# Altium PCB 主控A1.PcbDoc
Units mil, origin at the board's own origin, x right, y up, seen from the top; angles counter-clockwise.
Board outline 4488.19 x 1720.01 mil, 2 copper layers (Top Layer, Bottom Layer); 95 components, 144 nets, 409 pads, 126 vias.
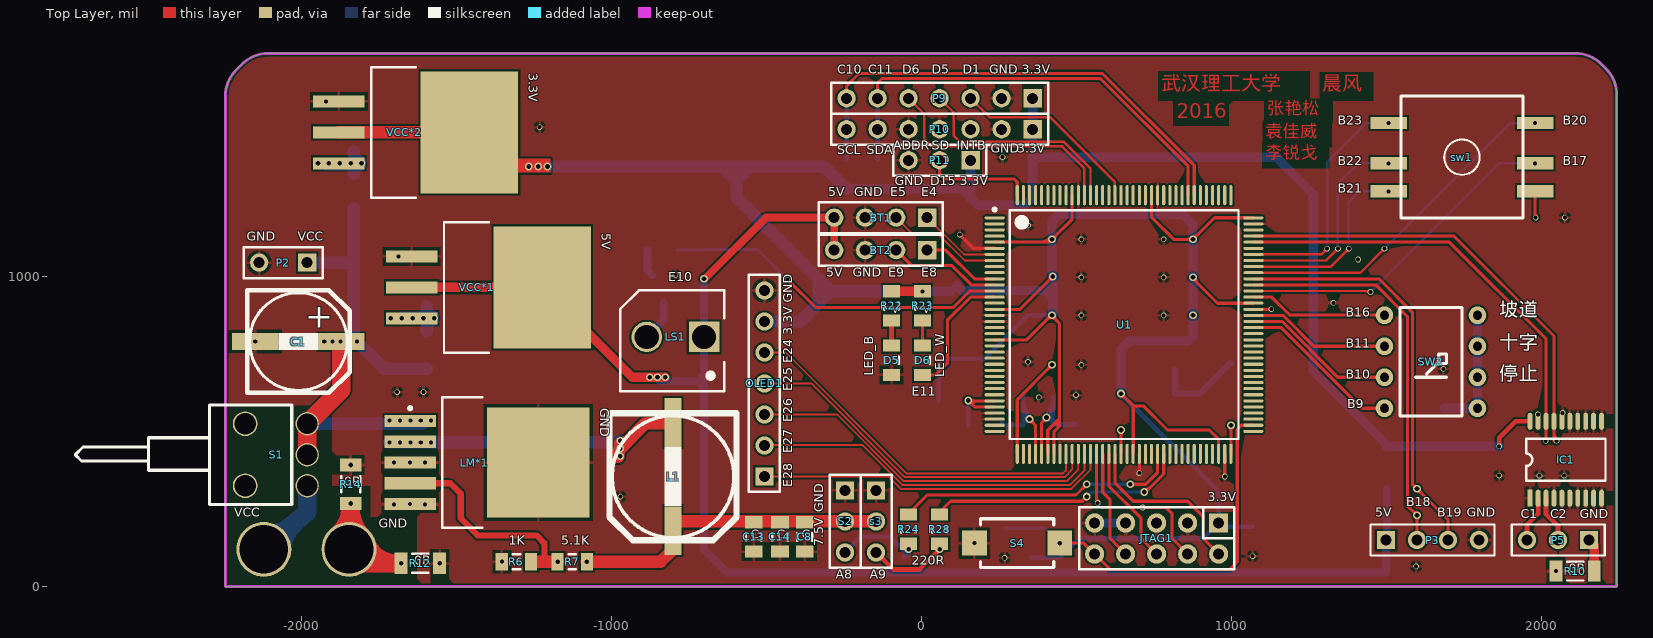
[diagram p0: Top Layer view]
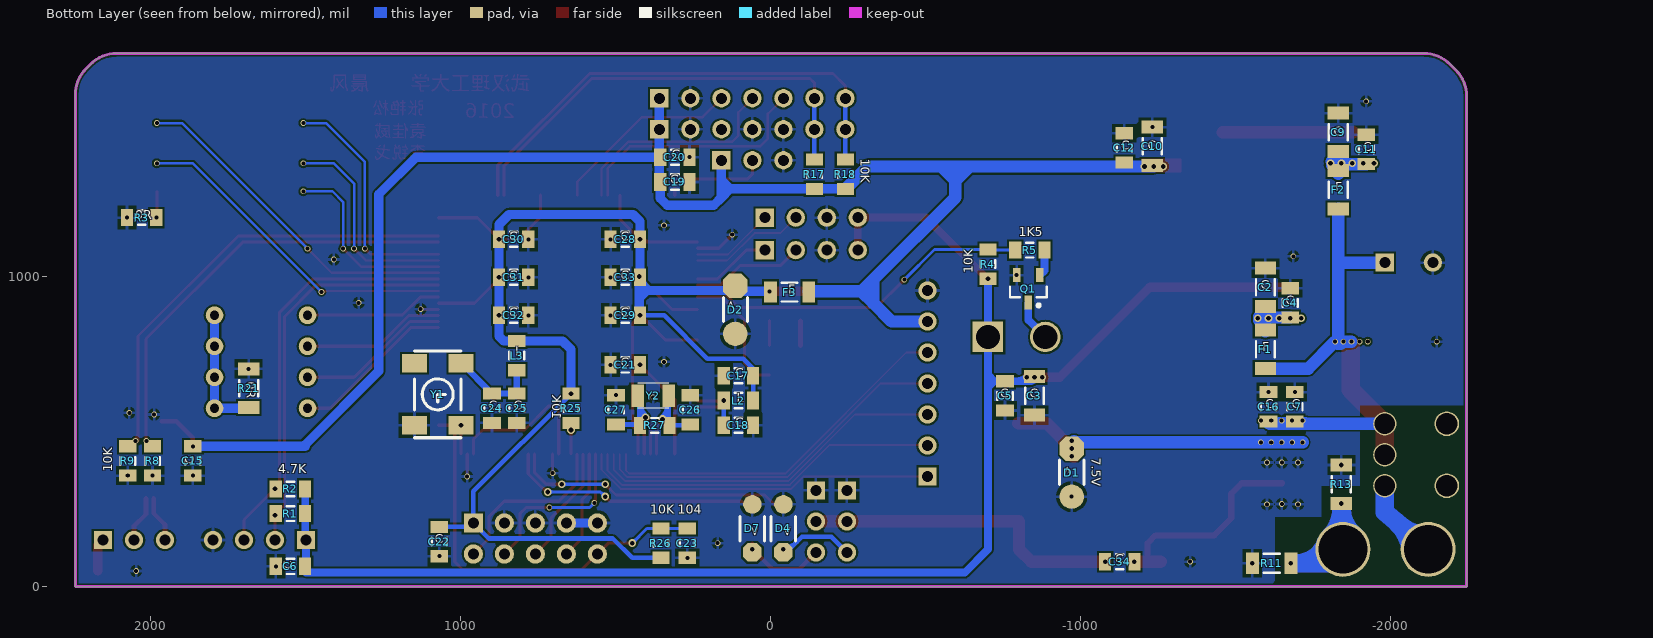
[diagram p1: Bottom Layer view, seen from below]

## Layer stack, top to bottom
Top Layer: signal copper 1.4
Dielectric: core 12.6, FR-4, Dk 4.8
Bottom Layer: signal copper 1.4

## Board outline
-2244.09,-0.01 -2244.09,1580.91 cw(c-2123.38,1580.91) -2208.74,1666.26 -2190.36,1684.64 cw(c-2105,1599.29) -2105,1720 2110,1720 cw(c2110,1599.29) 2195.36,1684.64 2208.74,1671.26 cw(c2123.38,1585.91) 2244.09,1585.91 2244.09,0.01

## Design rules (kind name [scope] priority, off if disabled: settings)
Clearance [All] p1: gap=6
PolygonConnect [All] p1: connectstyle=Relief reliefconductorwidth=10 reliefentries=4 polygonreliefangle="90 Angle" airgapwidth=10
RoutingVias [All] p1: holewidth=28 width=50 viastyle="Through Hole" minholewidth=28 minwidth=50 maxholewidth=28 maxwidth=50
SolderMaskExpansion [All] p1: expansion=4
Width [All] p1: maxlimit=60 minlimit=6 preferedwidth=10 minimp=50.000000 maximp=50.000000 favimp=50.000000
28 further rules are at their usual default settings.

## Components (designator, comment, footprint, x,y, rotation, side; value= is the part's Value field where it differs from the comment)
BT1 "Header 4" HDR1X4 20,1190 r180 top
BT2 "Header 4" HDR1X4 20,1085 r180 top
C1 "Cap Pol1" SMD-EC-F8 -1870,790 r180 top
C2 "Cap Pol1" 1206(2) -1595,965 r90 bottom
C3 "Cap Pol1" 1206(2) -850,615 r270 bottom
C4 "Cap" C2012 -1675,915 r270 bottom
C5 "Cap" C2012 -755,615 r90 bottom
C6 "100nF" C2012 1550,65 r180 bottom
C7 "680UF" c2012 -1690,580 r90 bottom
C8 "220UF" C2012 -375,160 r270 top
C9 "Cap Pol1" 1206(2) -1830,1465 r90 bottom
C10 "Cap Pol1" 1206(2) -1230,1420 r90 bottom
C11 "Cap" C2012 -1920,1410 r270 bottom
C12 "Cap" C2012 -1140,1415 r270 bottom
C13 "Cap" C2012 -540,160 r90 top
C14 "Cap" C2012 -455,160 r90 top
C15 "100nF" C2012 1865,405 r270 bottom
C16 "Cap" C2012 -1605,580 r270 bottom
C17 "100nF" C2012 105,680 r180 bottom
C18 "10nF" C2012 105,520 r0 bottom
C19 "10uF" C2012 310,1305 r0 bottom
C20 "100nF" C2012 310,1385 r0 bottom
C21 "100nF" c2012 470,715 r180 bottom
C22 "100nF" R2012 1070,145 r270 bottom
C23 "100nF" C2012 270,140 r90 bottom
C24 "10nF" C2012 900,575 r90 bottom
C25 "100nF" C2012 820,575 r90 bottom
C26 "18pF" C2012 260,570 r270 bottom
C27 "18pF" C2012 500,570 r270 bottom
C28 "Cap" C2012 470,1120 r180 bottom
C29 "Cap" C2012 470,875 r180 bottom
C30 "Cap" C2012 830,1120 r0 bottom
C31 "Cap" C2012 830,997.5 r0 bottom
C32 "Cap" C2012 830,875 r0 bottom
C33 "Cap" C2012 470,997.5 r180 bottom
C34 "Cap" C2012 -1125,80 r180 bottom
D1 "1SS355" "hole-chip diode"#1 -1010,290 r90 bottom
D2 "1N4729A" "hole-chip diode"#1 75,815 r90 bottom
D4 "1N4729A" "hole-chip diode"#2 0,265 r270 bottom
D5 "POWER" R2012 -95,730 r270 top
D6 "POWER" R2012 5,730 r270 top
D7 "1N4729A" "hole-chip diode"#2 100,265 r270 bottom
F1 "1.5A" 1206(2) -1595,765 r90 bottom
F2 "500mA" 1206(2) -1830,1280 r90 bottom
F3 "300mA" 1206(2) -60,950 r180 bottom
IC1 "74LVC245" "74LVC245 TSSOP" 1965,285 r90 top
JTAG1 "Header 5X2" IDC5X2 760,155 r180 top
L1 "33uH" SMD-EC-F10 -800,180 r90 top
L2 "Inductor" C2012 105,600 r0 bottom
L3 "Inductor" C2012 820,745 r270 bottom
LM*1 "lm2596" lm2596 -1400,400 r0 top
LS1 "Buzzer" ABSM-1574 -560,795 r180 top
OLED1 "Header 7" HDR1X7 -505,355 r90 top
P2 "Header 2" HDR1X2 -1980,1045 r180 top
P3 "Header 4" HDR1X4 1500,150 r0 top
P5 "Header 3" HDR1X3 2155,150 r180 top
P9 "Header 7" HDR1X7 360,1575 r180 top
P10 "Header 7" HDR1X7 360,1475 r180 top
P11 "endline" HDR1X3 160,1375 r180 top
Q1 "QNPN" SOT23_N -830,960 r270 bottom
R1 "Res2" R2012 1550,235 r0 bottom
R2 "Res2" R2012 1550,315 r180 bottom
R3 "10k" R2012 2030,1190 r180 bottom
R4 "10k" R2012 -700,1040 r90 bottom
R5 "Res2" R2012 -835,1085 r0 bottom
R6 "Res" R2012 -1305,80 r180 top
R7 "Res" R2012 -1125,80 r180 top
R8 "Res2" R2012 1995,405 r270 bottom
R9 "Res2" R2012 2075,405 r270 bottom
R10 "Res2" 1206(2) 2110,50 r180 top
R11 "Res2" 1206(2) -1615,75 r180 bottom
R12 "Res2" 1206(2) -1615,75 r180 top
R13 "Res2" 1206(2) -1840,330 r270 bottom
R14 "Res2" 1206(2) -1840,330 r270 top
R17 "Res2" R2012 -140,1330 r270 bottom
R18 "Res2" R2012 -240,1330 r270 bottom
R21 "Res2" 1206(2) 1685,640 r270 bottom
R22 "1K" R2012 -95,905 r90 top
R23 "1K" R2012 5,905 r90 top
R24 "220R" R2012 -40,185 r90 top
R25 "10K" R2012 645,575 r270 bottom
R26 "10K" R2012 355,140 r270 bottom
R27 "1M" R2012 375,520 r0 bottom
R28 "220R" R2012 60,185 r90 top
S1 "small switch" "small switch" -1980,325 r180 top
S2 "Header 3" HDR1X3 -245,310 r270 top
s3 "Header 3" HDR1X3 -145,310 r270 top
S4 "SW-PB" SMT_Button 310,140 r0 top
sw1 "SW-5" SW-5 1745,1385 r0 top
SW2 "SW DIP-4" switch_4to4 1495,575 r0 top
U1 "K60P144" LQFP144 655,845 r0 top
VCC*1 "LM1084" "DPAK LM2940" -1395,965 r0 top
VCC*2 "LM1086" "DPAK LM2940" -1630,1465 r0 top
Y1 "50MHZ" 贴片有源晶体 1150,720 r270 bottom
Y2 "32.768K" CT3215 330,615 r0 bottom

## Footprints (in the part's own frame and the unit in brackets; to place one, negate y for a bottom-side part, rotate by r counter-clockwise, add the part's x,y. Pads: shape width x height; smd on the part's side, far side on the other; paste and mask are expansions set on the pad)
"74LVC245 TSSOP" [mm]
  rect 1.4x0.4 smd: 1(0,0)
  oval 1.4x0.4 smd: 2(0,-0.65) 3(0,-1.3) 4(0,-1.95) 5(0,-2.6) 6(0,-3.25) 7(0,-3.9) 8(0,-4.55) 9(0,-5.2) 10(0,-5.85) 11(6.3,-5.85) 12(6.3,-5.2) 13(6.3,-4.55) 14(6.3,-3.9) 15(6.3,-3.25) 16(6.3,-2.6) 17(6.3,-1.95) 18(6.3,-1.3) 19(6.3,-0.65) 20(6.3,0)
  silkscreen extent 1.43,-6.18 4.87,0.33
1206(2) [mm]
  rect 1.05x1.75 smd: 1(-1.575,0) 2(1.575,0)
  silkscreen extent -0.65,-0.77 0.65,0.77, body extent -1.6,-0.8 1.6,0.8, height 1.6
ABSM-1574 [mm] "Magnetic Transducer Buzzer"
  rect 2.5x2.5 hole 2: 1A(3.556,-0.254)
  round 2.5 hole 2: 2A(8.255,-0.254)
  silkscreen extent 1.9,-4.06 10.41,4.19
C2012 [mm] "Chip Capacitor, 2-Leads, Body 2.0x1.2mm, IPC Low Density"
  rect 1x1.45 smd: 1(-1.2,0) 2(1.2,0)
  silkscreen extent -0.3,-0.63 0.3,0.63, body extent -0.98,-0.6 1.02,0.6, height 0.5
c2012 [mm] "Chip Capacitor, 2-Leads, Body 2.0x1.2mm, IPC Low Density"
  rect 1x1.45 smd: 1(-1.2,0) 2(1.2,0)
  silkscreen extent -0.3,-0.63 0.3,0.63, body extent -0.98,-0.6 1.02,0.6, height 0.5
CT3215 [mm]
  rect 1.05x1.85 smd: 1(0,0) 2(2.54,0)
  silkscreen extent 0,-1.02 2.54,1.02
"DPAK LM2940" [mm] "D2-PAK, 4-Pads, Body 7.93x8.69mm (max), IPC Medium Density"
  rect 4.2x1 smd: 1(-6.3,2.54) 2(-6.3,0) 3(-6.3,-2.54)
  rect 8x10 smd: 4(4.4,0)
  silkscreen extent -3.65,-5.35 0,5.35, body extent -3.65,-5.33 6,5.33, height 4.83
HDR1X2 [mm] "Connector; Header; 2 Position"
  rect 1.5x1.5 hole 0.9: 1(0,0)
  round 1.5 hole 0.9: 2(3.937,0)
  silkscreen extent -1.27,-1.27 5.21,1.27
HDR1X3 [mm] "Connector; Header; 3 Position"
  rect 1.5x1.5 hole 0.9: 1(0,0)
  round 1.5 hole 0.9: 2(2.54,0) 3(5.08,0)
  silkscreen extent -1.27,-1.27 6.35,1.27
HDR1X4 [mm] "Connector; Header; 4 Position"
  rect 1.5x1.5 hole 0.9: 1(0,0)
  round 1.5 hole 0.9: 2(2.54,0) 3(5.08,0) 4(7.62,0)
  silkscreen extent -1.27,-1.27 8.89,1.27
HDR1X7 [mm] "Connector; Header; 7 Position"
  rect 1.5x1.5 hole 0.9: 1(0,0)
  round 1.5 hole 0.9: 2(2.54,0) 3(5.08,0) 4(7.62,0) 5(10.16,0) 6(12.7,0) 7(15.24,0)
  silkscreen extent -1.27,-1.27 16.51,1.27
"hole-chip diode"#1 [mm]
  round 2 smd: 1(0,1.016)
  oct 2x2 smd: 2(3.937,1.016)
  silkscreen extent 1,0 3,2
"hole-chip diode"#2 [mm]
  round 1.524 smd: 1(0,1.016)
  oct 1.524x1.524 smd: 2(3.937,1.016)
  silkscreen extent 1,0 3,2
IDC5X2 [mil]
  rect 62x62 hole 35: 1(-200,-50)
  round 62 hole 35: 2(-200,50) 3(-100,-50) 4(-100,50) 5(0,-50) 6(0,50) 7(100,-50) 8(100,50) 9(200,-50) 10(200,50)
  silkscreen extent -250,-100 250,100
lm2596 [mm]
  rect 4.2x1 smd: 1(-6.3,3.4) 2(-6.3,1.7) 3(-6.3,0) 4(-6.3,-1.7) 5(-6.3,-3.4)
  rect 8.4x9 smd: 6(4.2,0)
  silkscreen extent -6.42,-5.35 -0.4,5.35, body extent -3.65,-5.32 6,5.33, height 4.83
LQFP144 [mm]
  oval 1.65x0.25 smd: 1(-10.6,8.75) 2(-10.6,8.25) 3(-10.6,7.75) 4(-10.6,7.25) 5(-10.6,6.75) 6(-10.6,6.25) 7(-10.6,5.75) 8(-10.6,5.25) 9(-10.6,4.75) 10(-10.6,4.25) 11(-10.6,3.75) 12(-10.6,3.25) 13(-10.6,2.75) 14(-10.6,2.25) 15(-10.6,1.75) 16(-10.6,1.25) 17(-10.6,0.75) 18(-10.6,0.25) 19(-10.6,-0.25) 20(-10.6,-0.75) 21(-10.6,-1.25) 22(-10.6,-1.75) 23(-10.6,-2.25) 24(-10.6,-2.75) 25(-10.6,-3.25) 26(-10.6,-3.75) 27(-10.6,-4.25) 28(-10.6,-4.75) 29(-10.6,-5.25) 30(-10.6,-5.75) 31(-10.6,-6.25) 32(-10.6,-6.75) 33(-10.6,-7.25) 34(-10.6,-7.75) 35(-10.6,-8.25) 36(-10.6,-8.75) 73(10.6,-8.75) 74(10.6,-8.25) 75(10.6,-7.75) 76(10.6,-7.25) 77(10.6,-6.75) 78(10.6,-6.25) 79(10.6,-5.75) 80(10.6,-5.25) 81(10.6,-4.75) 82(10.6,-4.25) 83(10.6,-3.75) 84(10.6,-3.25) 85(10.6,-2.75) 86(10.6,-2.25) 87(10.6,-1.75) 88(10.6,-1.25) 89(10.6,-0.75) 90(10.6,-0.25) 91(10.6,0.25) 92(10.6,0.75) 93(10.6,1.25) 94(10.6,1.75) 95(10.6,2.25) 96(10.6,2.75) 97(10.6,3.25) 98(10.6,3.75) 99(10.6,4.25) 100(10.6,4.75) 101(10.6,5.25) 102(10.6,5.75) 103(10.6,6.25) 104(10.6,6.75) 105(10.6,7.25) 106(10.6,7.75) 107(10.6,8.25) 108(10.6,8.75)
  oval 0.25x1.65 smd: 37(-8.75,-10.6) 38(-8.25,-10.6) 39(-7.75,-10.6) 40(-7.25,-10.6) 41(-6.75,-10.6) 42(-6.25,-10.6) 43(-5.75,-10.6) 44(-5.25,-10.6) 45(-4.75,-10.6) 46(-4.25,-10.6) 47(-3.75,-10.6) 48(-3.25,-10.6) 49(-2.75,-10.6) 50(-2.25,-10.6) 51(-1.75,-10.6) 52(-1.25,-10.6) 53(-0.75,-10.6) 54(-0.25,-10.6) 55(0.25,-10.6) 56(0.75,-10.6) 57(1.25,-10.6) 58(1.75,-10.6) 59(2.25,-10.6) 60(2.75,-10.6) 61(3.25,-10.6) 62(3.75,-10.6) 63(4.25,-10.6) 64(4.75,-10.6) 65(5.25,-10.6) 66(5.75,-10.6) 67(6.25,-10.6) 68(6.75,-10.6) 69(7.25,-10.6) 70(7.75,-10.6) 71(8.25,-10.6) 72(8.75,-10.6) 109(8.75,10.6) 110(8.25,10.6) 111(7.75,10.6) 112(7.25,10.6) 113(6.75,10.6) 114(6.25,10.6) 115(5.75,10.6) 116(5.25,10.6) 117(4.75,10.6) 118(4.25,10.6) 119(3.75,10.6) 120(3.25,10.6) 121(2.75,10.6) 122(2.25,10.6) 123(1.75,10.6) 124(1.25,10.6) 125(0.75,10.6) 126(0.25,10.6) 127(-0.25,10.6) 128(-0.75,10.6) 129(-1.25,10.6) 130(-1.75,10.6) 131(-2.25,10.6) 132(-2.75,10.6) 133(-3.25,10.6) 134(-3.75,10.6) 135(-4.25,10.6) 136(-4.75,10.6) 137(-5.25,10.6) 138(-5.75,10.6) 139(-6.25,10.6) 140(-6.75,10.6) 141(-7.25,10.6) 142(-7.75,10.6) 143(-8.25,10.6) 144(-8.75,10.6)
  silkscreen extent -10.72,-9.38 9.38,9.55, body extent -10,-10 10,10, height 1.6
R2012 [mm] "Chip Resistor, 2-Leads, Body 2.0x1.2mm, IPC Low Density"
  rect 1x1.4 smd: 1(-1.2,0) 2(1.2,0)
  silkscreen extent -0.3,-0.6 0.3,0.6, body extent -0.98,-0.6 1.02,0.6, height 0.5
"small switch" [mil]
  round 80 hole 70: 0(200,0) 0(200,-200)
  round 75 hole 65: 1(0,0) 2(0,-100) 3(0,-200)
  silkscreen extent 50,-260 748,60
SMD-EC-F8 [mm]
  rect 3.8x1.4 smd: 1(0,0) 2(7.051,0)
  silkscreen extent -0.69,-4.22 7.71,4.2
SMD-EC-F10 [mm]
  rect 4x1.4 smd: 1(0,0) 2(8.86,0)
  silkscreen extent -0.78,-5.2 9.62,5.2
SMT_Button [mil]
  rect 80x80 smd: 1(-137.8,0) 2(137.8,0)
  silkscreen extent -118,-79 118,79
SOT23_N [mm] "SOT23, 3-Leads, Body 2.9x1.3mm, Pitch 0.95mm, Lead Span 2.3mm - Reverse Pinning, IPC Medium Density"
  rect 1.15x0.6 smd: 1(1.125,0) 2(-1.125,-0.95) 3(-1.125,0.95)
  silkscreen extent -0.2,-1.5 1.47,1.5, body extent -0.7,-1.5 0.7,1.5, height 1.1
SW-5 [mm]
  rect 3x1 smd: 1(-6,2.8) 2(-6,-0.5) 3(-6,-2.8) 4(6,-2.8) 5(6,-0.5) 6(6,2.8)
  silkscreen extent -5,-5 5,5
switch_4to4 [mil]
  round 57 hole 30: 1(0,300) 2(0,200) 3(0,100) 4(0,0) 5(300,0) 6(300,100) 7(300,200) 8(300,300)
  silkscreen extent 50,-25 250,325
贴片有源晶体 [mil]
  rect 60x80 smd: 1(0,0) 2(200,0) 3(200,150) 4(0,150)
  silkscreen extent -40,0 240,150, body extent -37,-23 238,173, height 74

## Part data
BT1 BT2 P3: "Header, 4-Pin"
C1 C2 C3 C9 C10: "Polarized Capacitor (Radial)"
C4 C5 C11 C12 C28 C29 C30 C31 C32 C33: "贴片电容"
C6 C15 C17 C18 C19 C20 C21 C22 C23 C24 C25: library part Cap, "Capacitor"
C7 C8: library part CAP+
C13 C14 C16 C34: "Capacitor"
C26 C27: library part 陶瓷电容, "CAP"
D1 D2 D4 D7: library part "Diode 1N4148", "High Conductance Fast Diode"
D5 D6: library part LED, "Typical INFRARED GaAs LED"
F1 F2 F3: library part "Fuse 1", "Fuse"
JTAG1: "Header, 5-Pin, Dual row"
L1: library part Inductor, "Inductor"
LS1: "Magnetic Transducer Buzzer"
OLED1 P9 P10: "Header, 7-Pin"
P2: "Header, 2-Pin"
P5 S2 s3: "Header, 3-Pin"
P11: library part "Header 3", "Header, 3-Pin"
Q1: "NPN Bipolar Transistor"
R1 R2 R5 R8 R9 R10 R11 R12 R13 R14 R17 R18 R21: "Resistor"
R3 R4: library part Res, "Resistor of led"
R6 R7: "贴片电阻"
R22 R23 R24 R25 R26 R27 R28: library part Res, "Resistor"
S4: "Switch"
SW2: "DIP Switch, 4 Position, SPST"
VCC*1: library part LM1086
Y1: library part XTAL1
Y2: library part XTAL, "Crystal Oscillator"

## Free pads (board coordinates)
  round 177.17 hole 157.48: 0(-2120,120) 1(-1845,120)

## Via types
v1: diameter 18, hole 13, Top Layer to Bottom Layer, 78 vias
v2: diameter 25, hole 15, Top Layer to Bottom Layer, 48 vias

## Nets (pads, with @x,y where several pads share a name; then routed paths per layer and width w, separated by ;. In a path a pad name is that pad's centre, name@x,y a point inside that pad or via, vN(x,y) a via of type N, cw(c..) or ccw(c..) an arc to the next point about the centre after c; other vN are vias at no path point)
3.3V: C10.1 C12.2 C15.1 C19.2 C20.2 F3.2 IC1.20 OLED1.6 P9.1 P10.1 P11.1 R17.2 R18.2 VCC*2.2 VCC*2.4 | length 6118.2
  Top Layer w15: v1(1865,452.24) 1865,480 1918.03,533.03 IC1.20
  Top Layer w40: VCC*2.2 VCC*2.4
  Bottom Layer w30: R18.2 R17.2 132.24,1282.76 ; P11.1 160,1310.51 ; C19.2 357.24,1252.24 335,1230 185,1230 160,1255 ; C20.2 C20.2@360,1385 ; C19.2@360,1307.76 C20.2@360,1385 ; P9.1 P10.1 C20.2@360,1385 ; v1(1865,452.24) 1540,452.24 1502.76,452.24 1502.76,457.24 1265,695 1265,1265 1145,1385 C20.2@360,1385 ; 132.24,1282.76 160,1255 ; 132.24,1282.76 160,1310.51 ; 132.24,1282.76 157.24,1282.76 160,1280 ; 160,1255 160,1280 ; 160,1280 160,1310.51
  Bottom Layer w40: v2(-1235,1355) v2(-1205,1355) -640,1355 ; OLED1.6 -389.02,855 -330,914.02 ; R18.2 -312.24,1355 -550,1355 ; F3.2@-122.01,952.01 -292.01,952.01 ; -640,1355 -595,1310 ; -640,1355 -595,1355 ; -595,1310 -550,1355 ; -595,1310 -595,1355 ; -595,1310 -595,1255 -330,990 ; -595,1355 -550,1355 ; -330,914.02 -330,990 ; -330,914.02 -292.01,952.01 ; -330,990 -292.01,952.01
  other v2: -1265,1355
5V: BT1.4 BT2.4 C3.1 C5.2 C6.2 LS1.1A P3.1 R1.1 R2.2 R4.1 VCC*1.2 VCC*1.4 | length 5266.5
  Top Layer w25: v2(-700,992.76) -697.24,992.76 -500,1190 BT1.4 BT2.4
  Top Layer w30: VCC*1.2 VCC*1.4 -931.77,675 v2(-825,675)
  Bottom Layer w25: C3.1@-843.85,671.41 ccw(c-836.49,684.03) v2(-825,675) ; C3.1@-819.2,662.24 cw(c-819.2,705.8) v2(-850,675) ccw(c-835.24,677.17) C3.1@-835.24,662.24 ; -794.2,662.24 cw(c-794.2,705.8) v2(-825,675) ; v2(-700,992.76) LS1.1A -700,682.24 ; P3.1 1500,45 -625,45 -700,120 -700,642.24 ; P3.1@1502.76,152.76 R1.1 R2.2 ; C3.1@-835.24,662.24 C3.1 ccw(c-836.32,690.69) v2(-825,675) ; C3.1@-835.24,662.24 C5.2 -720,662.24 ; -720,662.24 -700,642.24 ; -720,662.24 -700,662.24 ; -720,662.24 -700,682.24 ; -700,642.24 -700,662.24 ; -700,662.24 -700,682.24
  other v2: -875,675
"ADC0 SE16": U1.36
"ADC1 SE16": U1.35
CLK: P9.7 P10.7 R18.1 U1.115 | length 1594.8
  Top Layer w10: P9.7 -240,1615 -200,1655 585,1655 881.38,1358.62 U1.115
  Bottom Layer w15: R18.1 P10.7 P9.7
DAC0: U1.38
DAC1: U1.39
EGND: pad.1 R11.2 R12.2 R13.2 R14.2 | length 1116.6
  Top Layer w60: pad.1@-1882.31,165.17 ccw(c-1956.51,254.99) -1840,254.99 pad.1@-1840,125 ; R14.2@-1840,249.36 ccw(c-1715.64,249.36) pad.1@-1803.58,161.42 ; pad.1@-1800,75 -1695,75 cw(c-1695.01,176.81) pad.1@-1790.22,140.75
  Bottom Layer w60: pad.1@-1882.31,165.17 ccw(c-1956.51,254.99) -1840,254.99 pad.1@-1840,125 ; R13.2@-1840,249.36 ccw(c-1715.64,249.36) pad.1@-1803.58,161.42 ; pad.1@-1800,75 -1695,75 cw(c-1695.01,176.81) pad.1@-1790.22,140.75
  other v2: -1677.01,75 -1840,267.99
EZP_CS: R25.2 U1.54 | length 105.6
  Top Layer w10: v2@639.7,499.7 cw(c626.51,486.51) 645.16,486.51 ; U1.54 v2@645.16,504.84 ; 645.16,487.27 cw(c662.73,487.27) v2@650.3,499.7
  other v2: 645,505
FB: C34.2 LM*1.4 R6.1 R7.2 | length 705.4
  Top Layer w20: LM*1.4 -1518.07,333.07 -1485,300 -1485,220 -1430,165 -1240,165 -1215,140 -1215,80
  Top Layer w40: R6.1 -1215,80 v2(-1172.24,80)
GND: BT1.3 BT2.3 C1.2 C2.2 C3.2 C4.1 C5.1 C6.1 C7.2 C8.2 C9.2 C10.2 C11.1 C12.1 C13.1 C14.1 C15.2 C16.1 C17.1 C18.1 C19.1 C20.1 C21.1 C22.2 C23.1 C24.1 C25.1 C26.1 C27.1 C28.1 C29.1 C30.1 C31.1 C32.1 C33.1 D1.1 D2.1 D4.1 D5.2 D7.1 IC1.1 IC1.4 IC1.5 IC1.6 IC1.7 IC1.8 IC1.9 IC1.10 IC1.11 IC1.12 IC1.13 IC1.14 IC1.15 IC1.16 IC1.19 JTAG1.3 JTAG1.5 JTAG1.7 JTAG1.9 LM*1.3 LM*1.5 LM*1.6 OLED1.7 P2.2 P3.4 P9.2 P10.2 P10.4 P10.5 P11.3 Q1.2 R3.1 R6.2 R8.2 R9.2 R10.2 R11.1 R12.1 R13.1 R14.1 R21.1 S2.1 s3.1 S4.1 U1.6 U1.17 U1.18 U1.33 U1.34 U1.44 U1.57 U1.71 U1.93 U1.107 U1.121 U1.134 VCC*1.1 VCC*2.1 Y1.2 | length 477.3
  Top Layer w10: v1@125,1131 cw(c125,1121.34) 131.83,1128.17 cw(c138.66,1135) v1@129,1135 ; v1(125,1135) 168.94,1091.06 U1.6 ; v1@701.38,368.62 ccw(c694.56,375.44) 704.21,375.44 ccw(c713.87,375.44) v1@707.04,368.62 ; v1(704.21,365.79) U1.57 ; v1@977.17,357.83 ccw(c970.82,364.18) 979.8,364.18 ; v1@979.8,355.2 U1.71 ; 979.8,365.13 ccw(c990.13,365.13) v1@982.83,357.83 ; U1.93 v1@1129.21,894.21 ; 1118.44,894.21 ccw(c1118.44,906.56) v1@1127.17,897.83
  Bottom Layer w30: JTAG1.9 JTAG1.7
  other v1: 2047.99,50 1597.24,65 -1352.24,80 270,92.76 1070,97.76 172.2,140 -1700,265 -1600,265 -1648.03,266.14 -970,290 980,355 1865,357.76 1995,357.76 2075,357.76 -1700,400 -1648.03,400 -1600,400 1990,555 2070,560 380,610 500,617.24 -1690,627.24 -1605,627.24 1685,702.01 517.24,715 345,725 -2147.59,790 517.24,875 782.76,875 1130,895 1330,915 517.24,997.5 782.76,997.5 -792.6,1004.29 1410,1055 -1685,1065 517.24,1120 782.76,1120 345,1165 2077.24,1190 262.76,1385 -1230,1482.01 -1920,1565
  other v2: -1552.99,75 -1840,392.01
K3.3V: C17.2 C22.1 C28.2 C29.2 C30.2 C31.2 C32.2 C33.2 D2.2 F3.1 JTAG1.1 L2.1 L3.1 R22.2 R23.2 R25.1 R26.2 U1.5 U1.16 U1.21 U1.42 U1.43 U1.56 U1.70 U1.94 U1.108 U1.122 U1.135 | length 6994.4
  Top Layer w10: U1.21 340.79,795.79 420,875 446.26,848.74 446.26,541.26 ; U1.16 319.21,894.21 v2(425,1000) ; U1.5 413.5,1110.75 ; 382.31,1110.75 ccw(c382.31,1160.44) v2@417.45,1125.3 ; 405.25,860.25 cw(c422.76,842.74) 422.76,867.5 cw(c422.76,856.05) 430.85,864.15 ; 406.46,1110.75 ccw(c406.46,1136.3) v2@424.52,1118.23 ; U1.42 408.94,503.94 430,525 ; 411.9,866.9 ccw(c403.8,875) v2@415.26,875 ; v2@415.5,1118.1 cw(c408.09,1116.17) 413.5,1110.75 ; v2@417.5,1000 cw(c399.39,1000) 412.2,987.2 cw(c425,974.39) v2@425,992.5 ; v2@420.86,1112.74 ccw(c418.92,1105.33) 413.5,1110.75 ; v2@422.76,1127.5 ccw(c422.76,1145.61) 435.56,1132.8 ccw(c448.36,1120) v2@430.26,1120 ; U1.43 428.62,498.62 446.26,516.26 ; v2@430.26,875 ccw(c455.02,875) 437.51,857.49 ; U1.135 487.68,1184.92 v2(422.76,1120) 413.5,1110.75 ; v2@645,614.74 cw(c645,596.64) 657.8,609.44 cw(c670.61,622.24) v2@652.5,622.24 ; v2(645,622.24) 684.53,582.72 ; U1.56 684.53,582.72 ; 695,580.47 695,582.72 ; U1.122 743.58,1191.42 815,1120 v2(877.24,1120) 946.73,1189.49 U1.108 ; v2@871.94,1114.7 ccw(c859.14,1101.89) 859.14,1120 ccw(c859.14,1138.11) v2@871.94,1125.3 ; v2(877.24,997.5) 875,995.26 956.36,913.9 U1.94 ; v2@877.24,1127.5 ccw(c877.24,1145.61) 890.05,1132.8 ccw(c902.85,1120) v2@884.74,1120 ; v2@884.74,997.5 ccw(c913.69,997.5) 893.22,977.03 ; U1.70 960.12,474.88 930,505 795,505 717.28,582.72 695,582.72 ; 430,525 446.26,541.26 ; 430,525 438.13,525 ; 438.13,525 438.13,524.38 446.26,516.26 ; 438.13,525 446.26,525 ; 446.26,516.26 446.26,525 ; 446.26,525 446.26,541.26 ; 684.53,582.72 695,582.72
  Top Layer w30: R22.2 R23.2
  Bottom Layer w15: L2.1 C17.2 57.76,702.76 90,735 205,735 345,875 v2(422.76,875) ; R26.2 447.76,92.76 510,155 910,155 JTAG1.1 ; v2(645,622.24) 960,307.24 JTAG1.1 ; C22.1 972.76,192.24 JTAG1.1
  Bottom Layer w30: v1(5,952.01) D2.2@97.01,952.01 ; D2.2 130,955 395,955 ; C33.2@418.66,978.66 ccw(c397.32,1000) C33.2@427.5,1000 ; C29.2@425,877.24 425,930 ; v2(425,1000) 425,930 ; C33.2@427.4,1000.69 cw(c409.84,995.67) C33.2@422.76,982.76 ; v2(645,622.24) 645,765 672.24,792.24 L3.1 862.24,792.24 877.24,807.24 v2(877.24,875) v2(877.24,997.5) v2(877.24,1120) 877.24,1167.76 845,1200 445,1200 422.76,1177.76 v2(422.76,1120) C33.2@422.76,982.76 ; C33.2@422.76,982.76 397.5,957.5 425,930
NetC2_1: C2.1 C4.2 F1.2 VCC*1.3 | length 256.2
  Bottom Layer w40: C4.2 v2@-1597.24,867.76 ; F1.2@-1595,822.75 cw(c-1527.75,822.75) v2@-1575.3,870.3 ; F1.2 C2.1 ccw(c-1537.51,902.99) v2@-1574.87,859.3
  other v2: -1710,865 -1675,865 -1640,865 -1605,865 -1570,865
NetC9_1: C9.1 C11.2 F2.2 VCC*2.3 | length 226.7
  Bottom Layer w40: C11.2 v2@-1850.75,1362.76 ; F2.2@-1830,1331.04 cw(c-1780.79,1331.04) v2@-1809.35,1371.11 ; F2.2 C9.1 ccw(c-1772.51,1402.99) F2.2@-1809.87,1359.3
  other v2: -1945,1365 -1910,1365 -1875,1365 -1840,1365 -1805,1365
NetC18_2: C18.2 L2.2 U1.31 U1.32 | length 327.9
  Top Layer w10: v2@152.24,592.5 cw(c152.24,574.39) 165.05,587.2 cw(c177.85,600) v2@159.74,600 ; v2@157.55,594.7 cw(c167.78,584.46) 167.78,598.94 ; v2@157.55,605.3 ccw(c172.92,620.67) 172.92,598.94 ; 165,588.94 175,598.94 ; U1.32 172.99,579.25 153.31,598.94 175,598.94 ; U1.31 175,598.94
  Bottom Layer w15: C18.2 v2(152.24,600)
NetC21_2: C21.2 U1.37 | length 362.3
  Top Layer w10: U1.37 310.51,602.76 v2(422.76,715) ; v2@415.26,715 cw(c397.15,715) 409.95,702.2 cw(c422.76,689.39) v2@422.76,707.5
NetC24_2: C24.2 C25.2 L3.2 Y1.4 | length 296
  Bottom Layer w20: L3.2 C25.2 C24.2 997.76,720 Y1.4
NetC26_2: C26.2 R27.1 U1.40 Y2.1 | length 445.8
  Top Layer w10: v2@350,532.5 cw(c350,514.39) 362.8,527.2 cw(c375.61,540) v2@357.5,540 ; v2(350,540) 369.57,520.43 U1.40
  Bottom Layer w15: C26.2@260,527.76 267.76,520 330,520 Y2.1 ; R27.1@330,528.69 cw(c351.4,528.69) v2@348.77,549.92 ; 330,564.14 ccw(c374.14,564.14) R27.1@342.93,532.93 ; Y2.1@330,600.36 ccw(c410.36,600.36) v2@353.54,543.54
NetC27_2: C27.2 R27.2 U1.41 Y2.2 | length 443.2
  Top Layer w10: U1.41 389.25,529.25 v2(405,545) ; v2@397.5,545 cw(c379.39,545) 392.2,532.2 cw(c405,519.39) v2@405,537.5
  Bottom Layer w15: v2@401.46,548.54 ccw(c344.64,605.36) Y2.2@425,605.36 ; v2@406.77,554.84 cw(c402.84,533.04) R27.2@425,533.04 ; R27.2@412.07,537.93 ccw(c380.86,569.14) 425,569.14 ; Y2.2@425,610 425,522.76 C27.2
NetD1_2: D1.2 L1.2 LM*1.2 | length 1119.5
  Top Layer w40: v2@-977.5,420 cw(c-935.25,420) v2@-965.13,449.87 ; v2@-977.25,418.08 cw(c-950.24,425.24) v2(-970,445) -888.1,526.9 L1.2@-798.1,526.9 ; v2@-970,462.5 ccw(c-970,504.75) -940.13,474.87
  Bottom Layer w40: v1(-1715,465) v1(-1681.25,465) v1(-1647.5,465) v1(-1613.75,465) v1(-1580,465) -990,465 cw(c-990,435.25) D1.2@-963.26,448.29 ; D1.2@-1000.18,465 cw(c-1000.18,414.82) D1.2@-964.7,450.3 ; D1.2@-977.4,468.77 ccw(c-951.71,473.03) D1.2@-966.86,451.85
  other v2: -970,420 -970,470
NetD4_2: D4.2 R24.1 S2.3 | length 365.7
  Bottom Layer w15: S2.3 -195,160 -100,160 D4.2@-40,100 ; -82.68,142.68 ccw(c-40,185.36) D4.2@-40,125 ; D4.2@-57.07,117.07 ccw(c-40,134.14) D4.2 -55,95 ccw(c-79.16,119.16) D4.2@-45,119.89
  other v2: -40,120
NetD5_1: D5.1 R22.1 | length 80.5
  Top Layer w15: D5.1 R22.1
NetD6_1: D6.1 R23.1 | length 80.5
  Top Layer w10: D6.1 R23.1
NetD7_2: D7.2 R28.1 s3.3 | length 272.5
  Top Layer w15: s3.3 -90,55 -5,55 v2(60,120) R28.1
NetIC1_2: IC1.2 P5.3 | length 149.7
  Top Layer w15: P5.3 1955,200 1990.59,235.59 IC1.2
NetIC1_3: IC1.3 P5.2 | length 151.1
  Top Layer w15: IC1.3 2016.18,233.82 2055,195 P5.2
NetLS1_2: LS1.2A Q1.1 | length 133.5
  Bottom Layer w25: LS1.2A -830,860 Q1.1
NetP5_1: P5.1 R10.1 | length 107
  Top Layer w30: P5.1 2172.01,132.99 R10.1
NetQ1_2: Q1.3 R5.1 | length 86.9
  Bottom Layer w25: R5.1 -882.24,1019.13 Q1.3
NetR3_2: R3.2 sw1.4 | length 94.9
  Top Layer w10: v1@1981.22,1191.54 sw1.4 ; 1981.22,1203.36 ccw(c1996.12,1203.36) v1@1985.58,1192.83
  other v1: 1982.76,1190
NetR21_2: R21.2 SW2.5 SW2.6 SW2.7 SW2.8 | length 407
  Bottom Layer w30: R21.2@1687.99,575 SW2.5 SW2.6 SW2.7 SW2.8
OLEDCLK: OLED1.5 U1.45 | length 1191.4
  Top Layer w6: OLED1.5 -437.12,755 -47.12,365 458,365 467.99,374.99 U1.45
OLEDCS: OLED1.1 U1.49 | length 1144.8
  Top Layer w6: OLED1.1 -105,355 -65,315 485,315 546.73,376.73 U1.49
OLEDDC: OLED1.2 U1.48 | length 1159
  Top Layer w6: OLED1.2 -503,457 -190.03,457 -61.03,328 481.03,328 527.05,374.02 U1.48
OLEDMISO: OLED1.4 U1.46 | length 1178
  Top Layer w6: OLED1.4 -354.09,655 -52.09,353 463,353 487.68,377.68 U1.46
OLEDRST: OLED1.3 U1.47 | length 1167.2
  Top Layer w6: OLED1.3 -271.06,555 -56.06,340 470,340 507.36,377.36 U1.47
"PGA0 DM": U1.28
"PGA0 PM": U1.27
"PGA1 DM": U1.30
"PGA1 PM": U1.29
"PGA2 DM": U1.24
"PGA2 DP": U1.23
"PGA3 DM": U1.26
"PGA3 PM": U1.25
PTA5: U1.55
PTA6: U1.58
PTA7: U1.59
PTA8: R24.2 U1.60 | length 1027.5
  Top Layer w10: R24.2@-40,245 -30,245 20,295 500,295 v2(535,330) ; v2@527.5,330 cw(c509.39,330) 522.2,317.2 cw(c535,304.39) v2@535,322.5 ; v2(675,330) 725,330 763.27,368.27 U1.60 ; v2@680.3,324.7 cw(c693.11,311.89) 693.11,330 cw(c693.11,348.11) v2@680.3,335.3
  Bottom Layer w10: v2(535,330) v2(675,330) ; v2@540.3,324.7 cw(c553.11,311.89) 553.11,330 cw(c553.11,348.11) v2@540.3,335.3 ; v2@669.7,324.7 ccw(c656.89,311.89) 656.89,330 ccw(c656.89,348.11) v2@669.7,335.3
PTA9: R28.2 U1.61 | length 947.6
  Top Layer w10: R28.2@60,240 95,275 520,275 v2(535,290) ; v2@527.5,290 cw(c509.39,290) 522.2,277.2 cw(c535,264.39) v2@535,282.5 ; v2(720,305) 725,305 782.95,362.95 U1.61 ; v2@720,312.5 ccw(c720,342.68) 741.34,321.34
  Bottom Layer w10: v2(535,290) 550,305 v2(720,305) ; v2@535,297.5 ccw(c535,315.61) 547.8,302.8 ccw(c560.61,290) v2@542.5,290 ; v2@714.7,299.7 ccw(c701.89,286.89) 701.89,305 ccw(c701.89,323.11) v2@714.7,310.3
PTA10: U1.62
PTA11: U1.63
PTA12: U1.64
PTA13: U1.65
PTA14: U1.66
PTA15: U1.67
PTA16: U1.68
PTA17: U1.69
PTA18: U1.72 Y1.3 | length 120.3
  Top Layer w10: v2@994.7,514.7 cw(c983.13,503.13) 999.49,503.13 ; U1.72 v2@999.49,519.49 ; 999.49,500.66 cw(c1019.34,500.66) v2@1005.3,514.7
  other v2: 1000,520
PTA19: U1.73
PTA24: U1.75
PTA25: U1.76
PTA26: U1.77
PTA27: U1.78
PTA28: U1.79
PTA29: U1.80
PTB0: U1.81
PTB1: U1.82
PTB2: U1.83
PTB3: U1.84
PTB4: U1.85
PTB5: U1.86
PTB6: U1.87
PTB7: U1.88
PTB8: U1.89
PTB9: SW2.4 U1.90 | length 533.3
  Top Layer w10: U1.90 1161.96,835.16 1422.12,575 SW2.4 SW2.4@1492.12,575
PTB10: SW2.3 U1.91 | length 497.2
  Top Layer w10: U1.91 1164.9,854.84 1344.75,675 SW2.3
PTB11: SW2.2 U1.92 | length 463.9
  Top Layer w10: U1.92 1167.85,874.53 1267.37,775 SW2.2
PTB16: SW2.1 U1.95 | length 445.5
  Top Layer w10: U1.95 1131.42,933.58 1189,876 SW2.1@1494,876
PTB17: sw1.5 U1.96 | length 1137.1
  Top Layer w8: U1.96 1446.73,953.27 v1(1450,950) ; 1430.04,953.27 cw(c1430.04,930.04) v1@1446.46,946.46
  Bottom Layer w8: v1(1450,950) 1865,1365 v1@1980,1365 ; v1@1450,955 ccw(c1450,967.07) 1458.54,958.54 ccw(c1467.07,950) v1@1455,950 ; 1968.39,1365 ccw(c1968.39,1378.15) v1@1977.68,1368.85 ; 1969.91,1365 cw(c1969.91,1354) v1@1977.68,1361.78
  other v1: 1981.22,1365.32
PTB18: P3.2 R1.2 U1.97 | length 1329.6
  Top Layer w10: U1.97 1467.05,972.95 1569,871 1569,261 v2(1600,230) P3.2 ; v2@1592.5,230 ccw(c1574.39,230) 1587.2,242.8 ccw(c1600,255.61) v2@1600,237.5 ; v2@1594.7,224.7 cw(c1581.89,211.89) 1600,211.89 cw(c1618.11,211.89) v2@1605.3,224.7
PTB19: P3.3 R2.1 U1.98 | length 1396.8
  Top Layer w10: U1.98 1477.36,992.64 1585,885 1585,330 v2(1600,315) 1700,215 P3.3 ; v2@1592.5,315 ccw(c1574.39,315) 1587.2,327.8 ccw(c1600,340.61) v2@1600,322.5 ; v2@1600,307.5 cw(c1600,289.39) 1612.8,302.2 cw(c1625.61,315) v2@1607.5,315
PTB20: sw1.6 U1.99 | length 1165.7
  Top Layer w8: U1.99 1417.32,1012.32 v1(1495,1090) ; v1@1490,1090 cw(c1477.93,1090) 1486.46,1081.46 cw(c1495,1072.93) v1@1495,1085
  Bottom Layer w8: v1(1495,1090) 1900,1495 v1@1981.22,1495 ; v1@1495,1095 ccw(c1495,1107.07) 1503.54,1098.54 ccw(c1512.07,1090) v1@1500,1090 ; 1968.58,1495 ccw(c1968.58,1507.88) v1@1977.68,1498.77 ; 1969.72,1495 cw(c1969.72,1483.74) v1@1977.68,1491.7
  other v1: 1981.22,1495.24
PTB21: sw1.3 U1.100 | length 681.9
  Top Layer w8: U1.100 1322.01,1032.01 v1(1380,1090) ; v1@1375,1090 cw(c1362.93,1090) 1371.46,1081.46 cw(c1380,1072.93) v1@1380,1085
  Bottom Layer w8: v1@1376.46,1093.54 ccw(c1367.93,1102.07) 1380,1102.07 ccw(c1392.07,1102.07) v1@1383.54,1093.54 ; v1(1380,1090) 1380,1240 1415,1275 v1@1508.78,1275 ; 1496.14,1275 cw(c1496.14,1262.12) v1@1505.24,1271.23 ; 1497.28,1275 ccw(c1497.28,1286.26) v1@1505.24,1278.3
  other v1: 1508.78,1274.76
PTB22: sw1.2 U1.101 | length 746.1
  Top Layer w8: U1.101 1306.69,1051.69 v1(1345,1090) ; v1@1340,1090 cw(c1327.93,1090) 1336.46,1081.46 cw(c1345,1072.93) v1@1345,1085
  Bottom Layer w8: v1@1341.46,1093.54 ccw(c1332.93,1102.07) 1345,1102.07 ccw(c1357.07,1102.07) v1@1348.54,1093.54 ; v1(1345,1090) 1345,1300 1410,1365 v1@1508.78,1365 ; 1495.95,1365 ccw(c1495.95,1378.15) v1@1505.24,1368.85 ; 1497.47,1365 cw(c1497.47,1354) v1@1505.24,1361.78
  other v1: 1508.78,1365.32
PTB23: sw1.1 U1.102 | length 832.8
  Top Layer w8: U1.102 1291.38,1071.38 v1(1310,1090) ; v1@1305,1090 cw(c1292.93,1090) 1301.46,1081.46 cw(c1310,1072.93) v1@1310,1085
  Bottom Layer w8: v1@1306.46,1093.54 ccw(c1297.93,1102.07) 1310,1102.07 ccw(c1322.07,1102.07) v1@1313.54,1093.54 ; v1(1310,1090) 1310,1370 1435,1495 v1@1508.78,1495 ; 1496.14,1495 ccw(c1496.14,1507.88) v1@1505.24,1498.77 ; 1497.28,1495 cw(c1497.28,1483.74) v1@1505.24,1491.7
  other v1: 1508.78,1495.24
PTC0: U1.103
PTC1: IC1.18 R8.1 U1.104 | length 1413.1
  Top Layer w10: U1.104 1704.25,1110.75 2016.18,798.82 IC1.18 2016.18,471.18 v1(2015,470) ; v1@2012.17,472.83 ccw(c2002.49,482.51) 2016.18,482.51
PTC2: IC1.17 R9.1 U1.105 | length 1500.1
  Top Layer w10: U1.105 1719.57,1130.43 2041.77,808.23 IC1.17 2041.77,478.23 v1(2050,470) ; 2041.77,475.38 ccw(c2055.38,475.38) v1@2045.76,465.76 ; 2041.77,499.52 ccw(c2079.52,499.52) v1@2052.83,472.83 ; v1@2046,470 ccw(c2036.34,470) 2043.17,476.83 ccw(c2050,483.66) v1@2050,474
PTC3: U1.106
PTC4: U1.109
PTC5: U1.110
PTC6: U1.111
PTC7: U1.112
PTC8: U1.113
PTC9: U1.114
PTC11: P9.6 P10.6 R17.1 U1.116 | length 1466
  Top Layer w10: P9.6 -140,1625 -126,1639 578.37,1639 861.69,1355.68 U1.116
  Bottom Layer w15: R17.1 P10.6 P9.6
PTC12: U1.117
PTC13: U1.118
PTC14: U1.119
PTC15: U1.120
PTC16: U1.123
PTC17: U1.124
PTC18: U1.125
PTC19: U1.126
PTD0: U1.127
PTD1: P9.3 U1.128 | length 619.7
  Top Layer w8: P9.3 220.47,1514.53 415.47,1514.53 625.47,1304.53 U1.128
PTD2: U1.129
PTD3: U1.130
PTD4: U1.131
PTD5: P9.4 U1.132 | length 710.4
  Top Layer w8: P9.4 105,1530 105,1455 126,1434 460.8,1434 546.73,1348.07 U1.132
PTD6: P9.5 U1.133 | length 793.6
  Top Layer w8: P9.5 10,1525 10,1445 35,1420 455,1420 527.05,1347.95 U1.133
PTD7: U1.136
PTD8: U1.137
PTD9: U1.138
PTD10: U1.139
PTD11: U1.140
PTD12: U1.141
PTD13: U1.142
PTD14: U1.143
PTD15: P11.2 U1.144 | length 348.2
  Top Layer w10: P11.2 60,1330 75,1315 300,1315 310.51,1304.49 U1.144
PTE0: U1.1
PTE1: U1.2
PTE2: U1.3
PTE3: U1.4
PTE4: BT1.1 U1.7 | length 266.8
  Top Layer w6: BT1.1 138.62,1071.38 U1.7
PTE5: BT1.2 U1.8 | length 375
  Top Layer w6: BT1.2 -30,1140 53.03,1140 141.34,1051.69 U1.8
PTE6: U1.9
PTE7: U1.10
PTE8: BT2.1 U1.11 | length 255.9
  Top Layer w10: BT2.1 80,1085 172.36,992.64 U1.11
PTE9: BT2.2 U1.12 | length 364.1
  Top Layer w10: BT2.2 -30,1035 100,1035 162.05,972.95 U1.12
PTE10: R4.2 R5.2 U1.13 | length 1155.4
  Top Layer w10: v1@-430,986 cw(c-430,976.34) -423.17,983.17 cw(c-416.34,990) v1@-426,990 ; v1(-430,990) -340,900 103.46,900 156.73,953.27 U1.13
  Bottom Layer w10: R5.2 R4.2@-700,1085 ; R4.2 -527.24,1087.24 v1(-430,990) ; v1@-434,990 ccw(c-443.66,990) -436.83,996.83 ccw(c-430,1003.66) v1@-430,994
PTE11: D6.2 U1.14 | length 417.9
  Top Layer w10: D6.2 47.76,682.76 85,720 85,858.91 159.67,933.58 U1.14
PTE12: U1.15
RESET: C23.2 JTAG1.10 R26.1 S4.2 U1.74 | length 1356.7
  Top Layer w10: v2(447.8,140) 525,140 JTAG1.10 610,55 995,55 1020,80 1020,506.77 1033.43,520.2 U1.74 ; S4.2@453.1,134.7 cw(c465.9,121.89) 465.9,140 cw(c465.9,158.11) S4.2@453.1,145.3
  Bottom Layer w10: C23.2 R26.1 400.55,187.24 v2(447.8,140) ; v2@440.3,140 ccw(c422.19,140) 434.99,152.8 ccw(c447.8,165.61) v2@447.8,147.5
TCK: JTAG1.4 U1.50 | length 625.6
  Top Layer w10: v1@566.42,270 U1.50 ; 566.42,288.31 ccw(c588.31,288.31) v1@572.83,272.83 ; v1(715,255) 790,255 810,235 810,155 JTAG1.4 ; v1@717.83,252.17 cw(c724.66,245.34) 724.66,255 cw(c724.66,264.66) v1@717.83,257.83
  Bottom Layer w10: v1@570,266 cw(c570,256.34) 576.83,263.17 cw(c583.66,270) v1@574,270 ; v1(570,270) 585,255 v1(715,255) ; v1@712.17,252.17 ccw(c705.34,245.34) 705.34,255 ccw(c705.34,264.66) v1@712.17,257.83
TDI: JTAG1.8 U1.51 | length 353.3
  Top Layer w10: U1.51 586.1,303.9 610,280 610,155 JTAG1.8
TDO: JTAG1.6 U1.52 | length 386.6
  Top Layer w10: U1.52 605.79,324.21 710,220 710,155 JTAG1.6
TMS: JTAG1.2 U1.53 | length 563.8
  Top Layer w10: U1.53 625.47,334.53 685,275 860,275 910,225 910,155 JTAG1.2
USB0_DM: U1.20
USB0_DP: U1.19
VADJ: C8.1 C13.2 C14.2 C34.1 L1.1 R7.1 S2.2 s3.2 | length 1039.3
  Top Layer w40: v2(-1077.76,80) -840,80 -800,120 -800,210 s3.2
VBAT: pad.0 S1.1 | length 491.6
  Bottom Layer w60: pad.0 -1980,240 S1.1 ; pad.0@-2120,165 ccw(c-2120,306.43) -2019.99,206.42 ; pad.0@-2065,100 cw(c-1923.57,100) -2023.58,200.01
VCC: C1.1 C7.1 C16.2 F1.1 F2.1 LM*1.1 P2.1 S1.2 S1.3 | length 1720.7
  Top Layer w60: S1.2 S1.3 -1870,635 C1.1@-1870,780
  Bottom Layer w40: S1.3 C16.2@-1612.76,525 ; P2.1 -1835,1045 ; v1(-1872.5,790) v1(-1846.25,790) v1(-1820,790) -1732.99,702.99 F1.1 ; -1838.47,782.22 ccw(c-1858.92,802.67) -1830,802.67 ; -1830,800 F2.1 ; -1722.78,527.22 ccw(c-1717.41,532.59) C7.1@-1717.41,525 ; C7.1@-1712.59,525 ccw(c-1712.59,532.59) C7.1@-1707.22,527.22 ; C7.1@-1689.03,527.22 ccw(c-1683.66,532.59) C7.1@-1683.66,525 ; C7.1@-1678.84,525 ccw(c-1678.84,532.59) C7.1@-1673.47,527.22 ; -1655.28,527.22 ccw(c-1649.91,532.59) -1649.91,525 ; -1645.09,525 ccw(c-1645.09,532.59) -1639.72,527.22 ; C16.2@-1611.34,525 ccw(c-1611.34,532.59) C16.2@-1605.97,527.22 ; -1830,787.59 ccw(c-1822.41,787.59) -1827.78,782.22 cw(c-1822.41,787.59) -1830,787.59
  other v1: -1715,535 -1681.25,535 -1647.5,535 -1613.75,535 -1580,535 -1925,790 -1898.75,790
VREGIN: U1.22
pads on no net: P10.3 S1.0 Y1.1

## Polygon pours and split planes (outlines as drawn)
GND on Top Layer "Top Layer-GND" (solid, remove dead copper, pour order 6): -1965,1720 -2244.09,1720 -2244.09,1520 -2244.09,585 -1925,585 -1900,585 -1900,340 -1900,325 -1775,325 -1775,225 -1625,225 -1625,0 -1320,0 2244.09,0 2244.09,160 2244.09,1720 2045,1720
GND on Bottom Layer "Top Layer-GND" (solid, remove dead copper, pour order 8): -1970,1720 -2244.09,1720 -2244.09,1530 -2244.09,585 -2005,585 -1900,585 -1900,490 -1900,325 -1795,325 -1775,325 -1775,305 -1775,225 -1670,225 -1625,225 -1625,160 -1625,0 -1470,0 2245,0 2245,805 2245,1720 1695,1720

## Keep-outs
Keep-Out Layer:
  lines w10: -2244.09,-0.01 2244.09,0.01 2244.09,1585.91 ccw(c2123.38,1585.91) 2208.74,1671.26 2195.36,1684.64 ccw(c2110,1599.29) 2110,1720 2068.21,1720 -1107.36,1720 -2080,1720 -2105,1720 ccw(c-2105,1599.29) -2190.36,1684.64 -2208.74,1666.26 ccw(c-2123.38,1580.91) -2244.09,1580.91 -2244.09,-0.01

## Other copper
Top Layer:
  rectangle net 3.3V: -1325,1335 -1195,1380
  text "武汉理工大学" at 775,1585 h80
  text "晨风" at 1295,1585 h80
  text "张艳松" at 1117.14,1508.66 h70
  text "2016" at 825,1495 h80 r0.25
  text "袁佳威" at 1110,1435 h70
  text "李锐戈" at 1110,1365 h70

## Silkscreen, mask and mechanical layers (free items; w line width, h text height)
Top Overlay:
  text "3.3V" at -1275,1655 h50 r270
  text "C10" at -270,1645 h50
  text "C11" at -170,1645 h50
  text "D6" at -60,1645 h50
  text "D5" at 35,1645 h50
  text "D1" at 135,1645 h50
  text "GND" at 220,1645 h50
  text "3.3V" at 325,1645 h50
  text "B23" at 1345,1480 h50
  text "B20" at 2070,1480 h50
  text "ADDR" at -90,1400 h50
  text "SD" at 35,1400 h50
  text "INTB" at 115,1400 h50
  text "GND" at 225,1390 h50
  text "3.3v" at 310,1390 h50
  text "SCL" at -270,1385 h50
  text "SDA" at -175,1385 h50
  text "B22" at 1345,1350 h50
  text "B17" at 2070,1350 h50
  text "GND" at -85,1285 h50
  text "D15" at 30,1285 h50
  text "3.3V" at 125,1285 h50
  text "B21" at 1345,1260 h50
  text "5V" at -300,1250 h50
  text "GND" at -215,1250 h50
  text "E5" at -100,1250 h50
  text "E4" at 0,1250 h50
  text "5V" at -1040,1140 h50 r270
  text "GND" at -2175,1105 h50
  text "VCC" at -2010,1105 h50
  text "5V" at -305,990 h50
  text "GND" at -220,990 h50
  text "E9" at -105,990 h50
  text "E8" at 0,990 h50
  text "E10" at -815,975 h50
  text "GND" at -405,915 h50 r90
  text ">" at -105,910 h50 r270
  text ">" at -5,910 h50 r270
  text "B16" at 1370,860 h50
  text "坡道" at 1865,855 h78.74
  text "3.3V" at -405,810 h50 r90
  text "B11" at 1370,760 h50
  text "十字" at 1865,750 h78.74
  text "E24" at -405,720 h50 r90
  text "LED_B" at -145,680 h50 r90
  text "LED_W" at 85,675 h50 r90
  text "B10" at 1370,660 h50
  text "停止" at 1865,650 h78.74
  text "E25" at -405,630 h50 r90
  text "E11" at -30,605 h50
  text "GND" at -1045,575 h50 r270
  text "B9" at 1375,565 h50
  text "E26" at -405,530 h50 r90
  text "E27" at -405,430 h50 r90
  text "E28" at -405,320 h50 r90
  text "0R" at -1860,315 h50
  text "3.3V" at 925,265 h50
  text "B18" at 1565,250 h50
  text "GND" at -305,240 h50 r90
  text "VCC" at -2215,215 h50
  text "5V" at 1465,215 h50
  text "B19" at 1665,215 h50
  text "GND" at 1760,215 h50
  text "C1" at 1935,210 h50
  text "C2" at 2030,210 h50
  text "GND" at 2125,210 h50
  text "GND" at -1750,180 h50
  text "C" at -550,145 h50
  text "C" at -465,145 h50
  text "C" at -385,145 h50
  text "7.5V" at -305,130 h50 r90
  text "1K" at -1330,125 h50
  text "5.1K" at -1160,125 h50
  text "0R" at -1635,60 h50
  text "220R" at -30,60 h50
  text "0R" at 2090,35 h50
  text "A8" at -275,15 h50
  text "A9" at -165,15 h50
Bottom Overlay:
  text "C" at -1815,1445 h50
  text "C" at -1215,1400 h50
  text "C" at -1130,1400 h50
  text "C" at -1910,1395 h50
  text "10K" at -280,1380 h50 r90
  text "C" at 320,1370 h50
  text "C" at 325,1290 h50
  text "F" at -1820,1265 h50
  text "0R" at 2050,1175 h50
  text "1K5" at -800,1120 h50
  text "C" at 485,1105 h50
  text "C" at 845,1105 h50
  text "10K" at -660,1010 h50 r270
  text "C" at 485,980 h50
  text "C" at 845,980 h50
  text "C" at -1580,950 h50
  text "F" at -55,935 h50
  text "C" at -1660,900 h50
  text ">" at 105,890 h50 r270
  text "C" at 485,860 h50
  text "C" at 845,860 h50
  text "F" at -1585,750 h50
  text "L" at 825,735 h50
  text "C" at 485,700 h50
  text "C" at 115,665 h50
  text "0R" at 1700,660 h50 r90
  text "C" at -835,600 h50
  text "C" at -740,600 h50
  text "L" at 110,585 h50
  text "C" at -1680,565 h50
  text "C" at -1595,565 h50
  text "C" at 830,560 h50
  text "C" at 910,560 h50
  text "10K" at 715,540 h50 r90
  text "C" at 115,505 h50
  text "7.5V" at -1025,415 h50 r90
  text "C" at 1850,395 h50 r270
  text "10K" at 2115,370 h50 r270
  text ">" at -980,355 h50 r270
  text "4.7K" at 1590,355 h50
  text "104" at 300,225 h50
  text "10K" at 390,225 h50
  text ">" at -30,195 h50 r90
  text ">" at 75,195 h50 r90
  text "C" at 1085,130 h50
  text "C" at -1110,65 h50
  text "C" at 1535,55 h50 r270
Top Solder:
  drawing of 2348 lines, arcs and shapes, not listed
  text "武汉理工大学" at 1805,1085 h70
  text "晨风" at 2050,995 h70
  text "2016" at 2060,920 h70 r0.25
Mechanical 15:
  lines w10: -1397.64,0 -1397.64,1720 ; -1200.79,0 -1200.79,1720 ; 0,-925 0,1470.18 ; 1200.79,0 1200.79,1720 ; 1397.64,0.01 1397.64,1720 ; -1545,70 -415,70 -415,1240 -1545,1240 -1545,70
  lines w39.37: -2322.83,1470.18 -2440.94,1076.48 -2480.32,682.78 -2480.32,-140 2480.31,-140 2480.31,682.78 2440.94,1076.48 2322.83,1470.18 ; -2322.83,1470.18 -2086.61,1863.88 -1870.08,2257.58 1870.08,2257.58 2086.61,1863.88 2322.83,1470.18 ; -2322.83,1470.18 2322.83,1470.18

## Text inside footprints (layer, text, board x,y; h text height)
C1: Top Overlay "+" at -1895.21,900.93 h78.74 r180